# Allegro board OSCILLATOR.brd
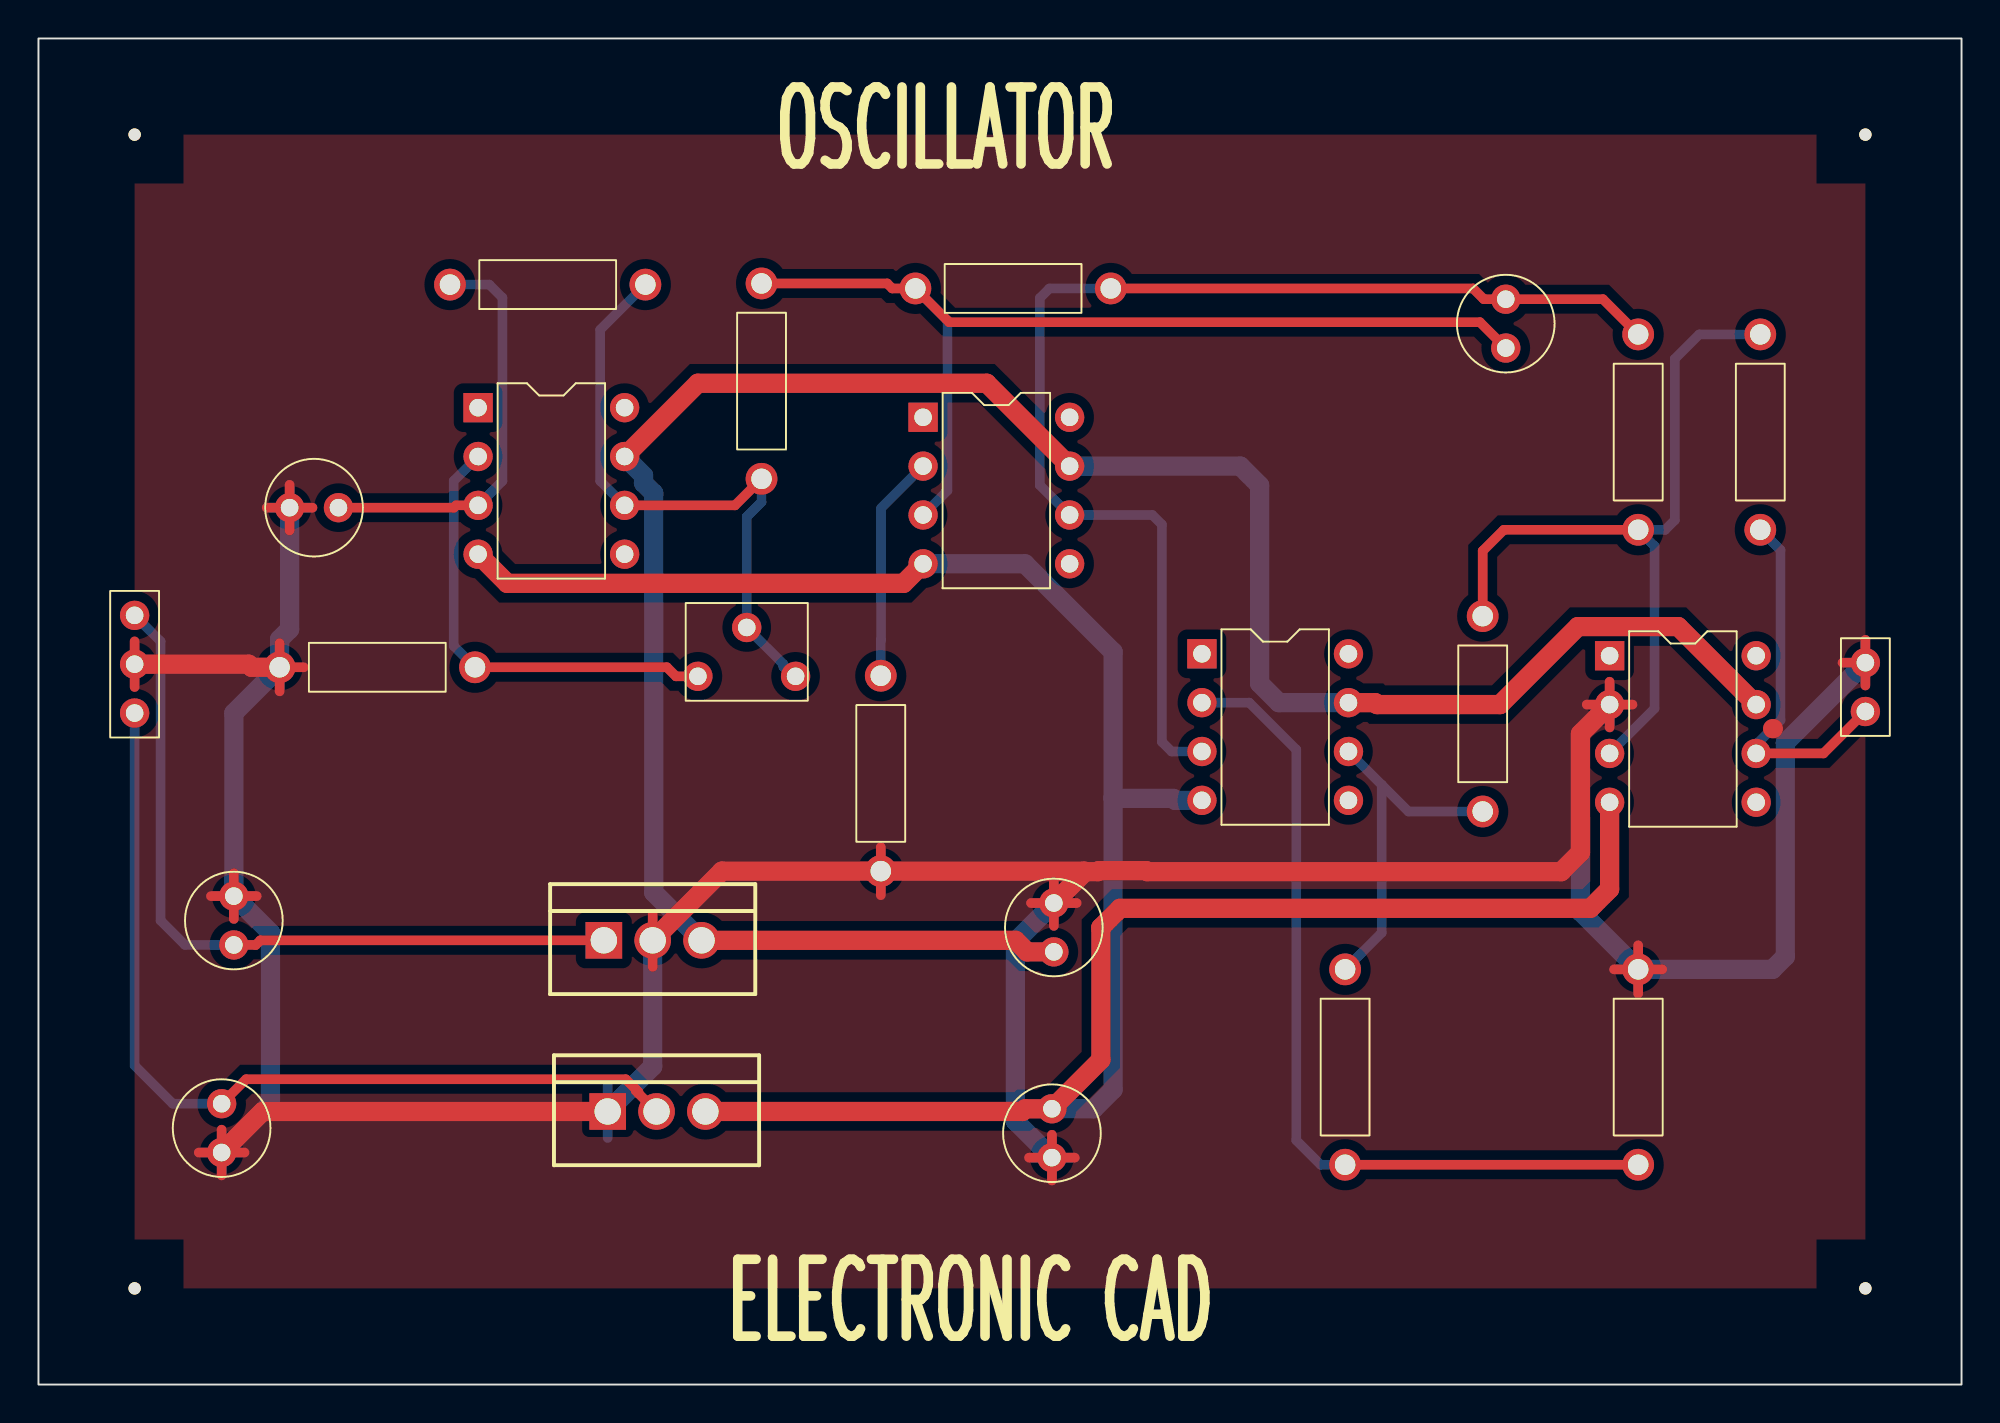
[diagram p0: board, top side]
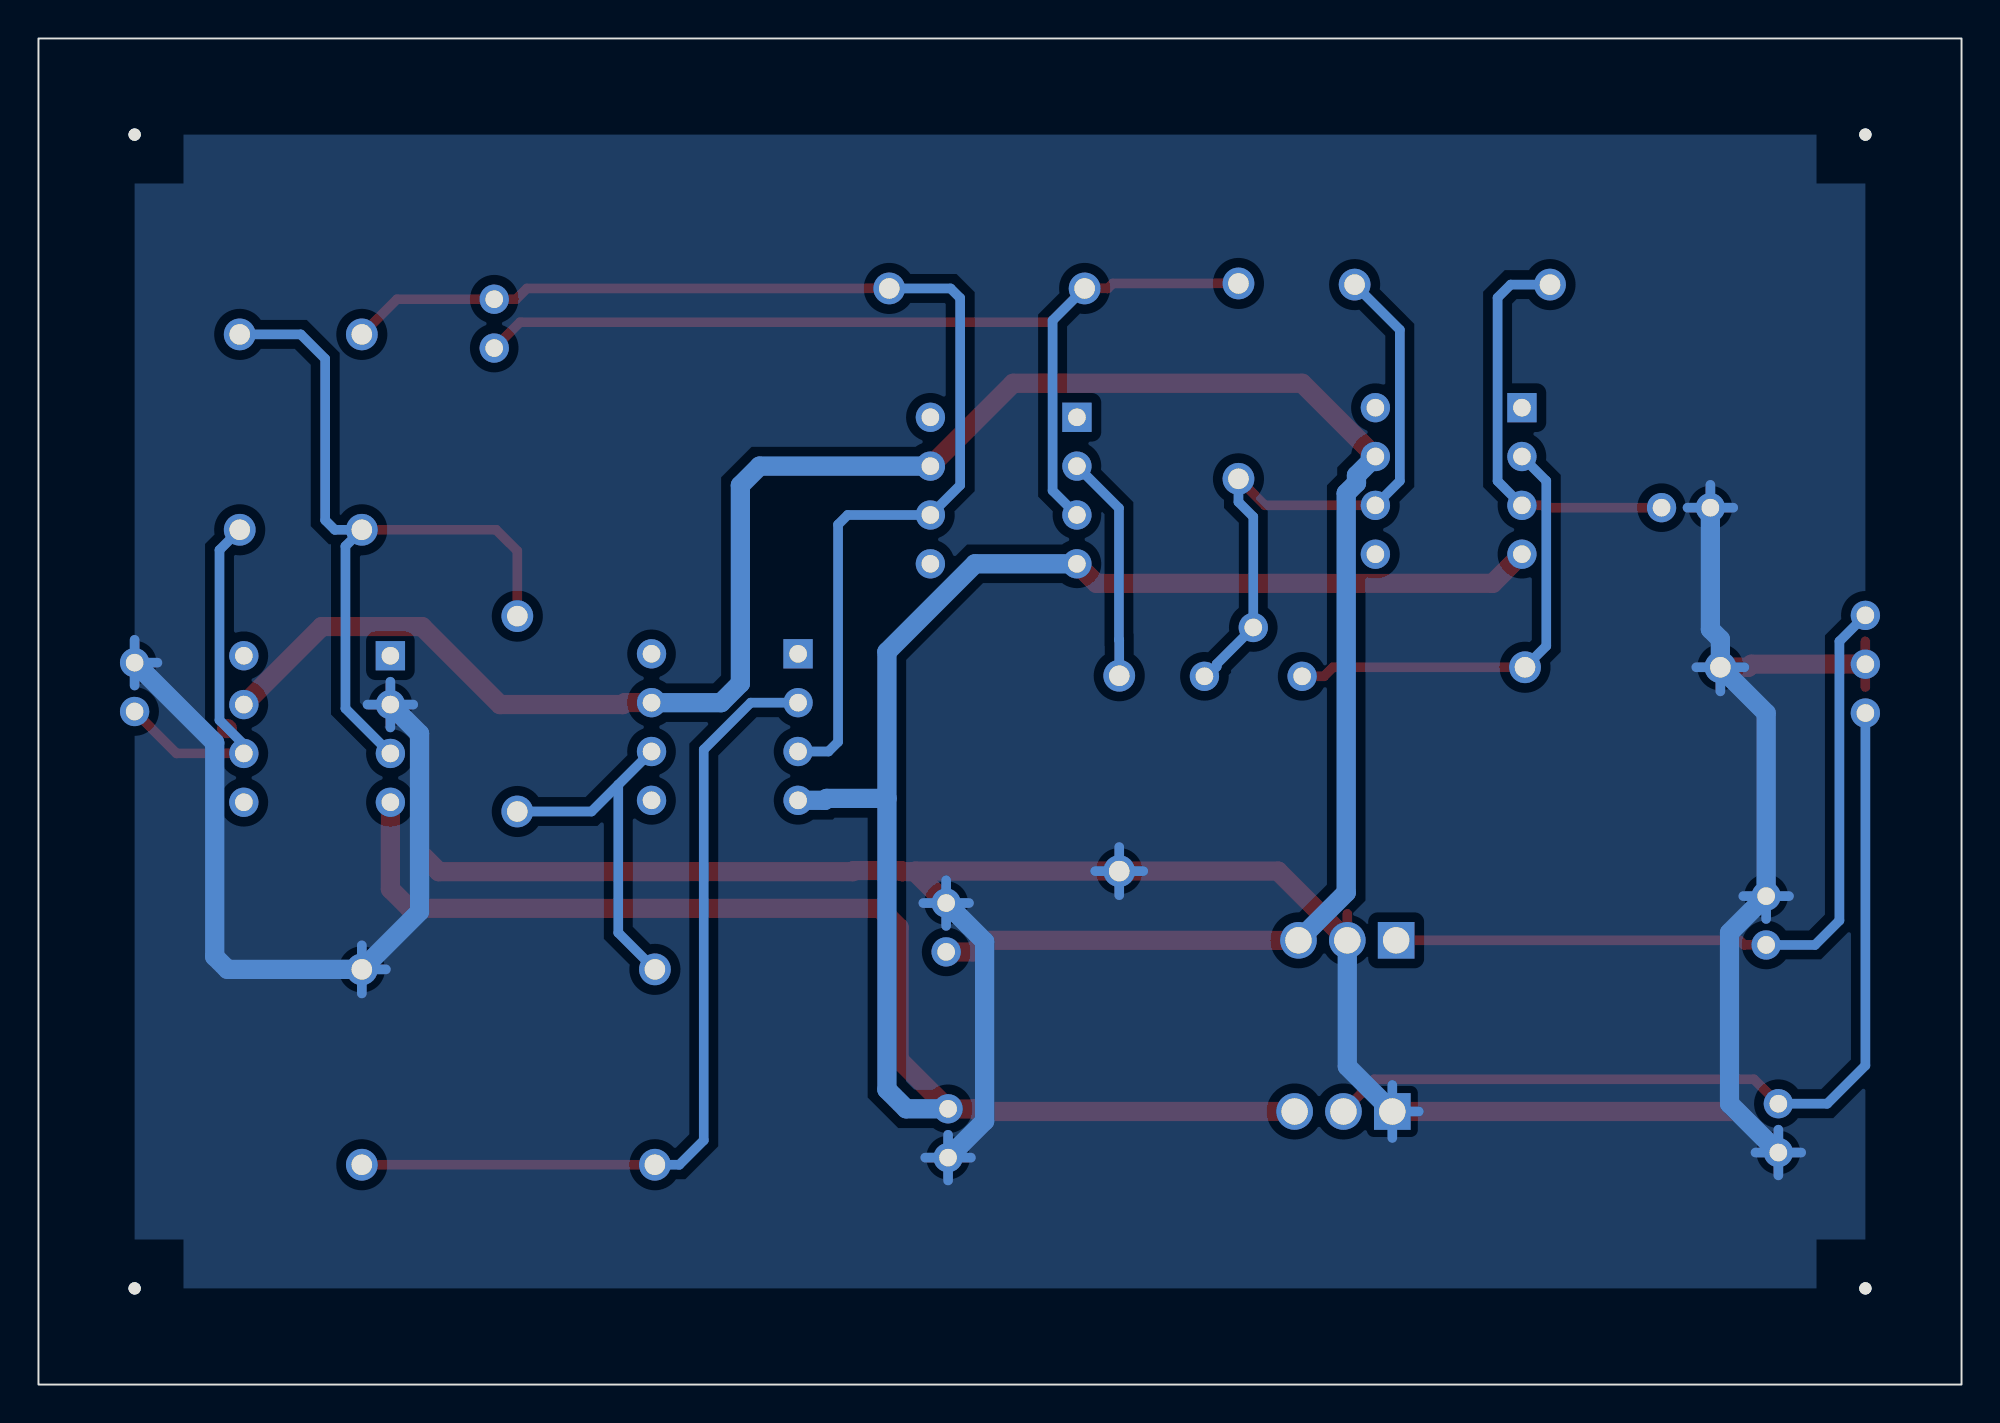
[diagram p1: board, bottom side, seen from below]

Outline 100 x 70 mm; copper layers: TOP, BOTTOM. Coordinates in mm from the lower left corner of the outline.
Outline path: rectangle 0,0 100,70

## Design rules (mm)
constraint set DEFAULT: min track width 0.5, pair gap 0.5
net group POWERWORKS: nets +VCC -VCC

## Placement (name value [footprint] x y rotation side)
C1  270pF  [CAP196]  15.6 45.6 90 top
C2  0.001uF  [CAP196]  76.3 53.9 0 top
C3  0.1uF  [CAP196]  10.16 22.86 0 top
C4  0.1uF  [CAP196]  9.53 12.06 0 top
C5  0.1uF  [CAP196]  52.8 22.5 0 top
C6  0.1uF  [CAP196]  52.7 11.8 0 top
J1  CON3  [JUMPER3]  5 40 270 top
J2  CON2  [JUMPER2]  95 35 90 top
NOREF  -  [unnamed]  95 65 0 top
NOREF#2  -  [#2]  100 0 90 top
NOREF#3  -  [unnamed]  95 5 0 top
NOREF#4  -  [unnamed]  5 65 0 top
NOREF#5  -  [unnamed]  5 5 0 top
NOREF#6  -  [#2]  0 70 0 top
R1  10k  [RES400]  22.7 37.3 90 top
R2  62k  [RES400]  37.6 47.1 0 top
R3  10k  [RES400]  21.4 57.2 270 top
R4  1M  [RESADJ]  39.37 36.83 270 top
R5  100k  [RES400]  45.6 57 270 top
R6  10k  [RES400]  43.8 26.7 0 top
R7  10k  [RES400]  75.1 29.8 0 top
R8  10k  [RES400]  83.19 54.61 180 top
R9  10k  [RES400]  89.53 54.61 180 top
R10  10k  [RES400]  67.94 11.43 0 top
R11  10k  [RES400]  83.19 21.59 180 top
U1  LF351  [DIP8_3]  22.86 50.8 0 top
U2  LF351  [DIP8_3]  46 50.3 0 top
U3  LM7812C  [TO220AB]  29.4 23.1 0 top
U4  LM7912C  [TO220AB]  29.6 14.2 0 top
U5  LF351  [DIP8_3]  60.5 38 0 top
U6  LF351  [DIP8_3]  81.7 37.9 0 top

## Library data of the parts
C1-C6 = CAP NP: Tolerance: ***; User Part Number: ***
J1 = CON3: User Part Number: ***
J2 = CON2: User Part Number: ***
R1-R3 R5-R11 = R: Tolerance: ***; User Part Number: ***
R4 = POT: Tolerance: ***; User Part Number: ***
U1 U2 U5 U6 = LF351: Tolerance: ***; User Part Number: ***
U3 = LM7812C_1
U4 = LM7912C_3

## Footprints (pads in the part's own frame, mm; a bottom-side part is the same pattern mirrored in y, then rotated)
CAP196
  round 1.524 hole 0.914: 1(0,0) 2(0,2.54)
DIP8_3
  rect 1.524x1.524 hole 0.914: 1(0,0)
  round 1.524 hole 0.914: 2(0,-2.54) 3(0,-5.08) 4(0,-7.62) 5(7.62,-7.62) 6(7.62,-5.08) 7(7.62,-2.54) 8(7.62,0)
JUMPER2
  round 1.524 hole 0.914: 1(0,0) 2(2.54,0)
JUMPER3
  round 1.524 hole 0.914: 1(0,0) 2(2.54,0) 3(5.08,0)
RES400
  round 1.651 hole 1.067: 1(0,0) 2(0,10.16)
RESADJ
  round 1.524 hole 0.914: 1(0,0) 2(-2.54,-2.54) 3(0,-5.08)
TO220AB
  rect 1.905x1.905 hole 1.372: 1(0,0)
  round 1.905 hole 1.372: 2(2.54,0) 3(5.08,0)
unnamed
  round 0.635 hole 3.175 unplated: (0,0)

## Nets
+VCC: C5.1 U1.7 U2.7 U3.3(OUT) U5.7 U6.7
-VCC: C6.2 U1.4(V-) U2.4(V-) U4.3(OUT) U5.4(V-) U6.4(V-)
GND: C1.2 C3.2 C4.1 C5.2 C6.1 J1.2 J2.2 R1.2 R6.1 R11.1 U3.2 U4.1 U6.2
OUT: C3.1 J1.1 U3.1
SIG: C2.2 R5.2 R8.1 U2.6 U5.3
N00233: C1.1 R3.1 U1.3
N00258: R1.1 R4.3 U1.2
N00276: R2.1 R3.2 R4.1 R4.2(WIPER) U1.6
N00401: C2.1 R2.2 R5.1 U2.3
N00560: R6.2 U2.2
N00834: C4.2 J1.3 U4.2
N02155: R7.2 R8.2 R9.1 U6.3
N02167: R7.1 R10.2 U5.6
N02180: R10.1 R11.2 U5.2
N02221: J2.1 R9.2 U6.6

Pads without a net: U1 1 5 8; U2 1 5 8; U5 1 5 8; U6 1 5 8

## Routing (per net, layer and track width the routed paths; a pad name or vN(x,y) marks a point on that pad's centre or on a via; arc(x,y) is an arc through that point)
+VCC: length 122.1
  TOP w1: U5.7 69.51,35.46 69.61,35.36 76,35.36 80.06,39.42 85.26,39.42 U6.7 ; U3.3 50.81,23.1 51.41,22.5 C5.1 ; U2.7 49.31,52.07 34.29,52.07 U1.7
  BOTTOM w1: U2.7 62.5,47.76 63.5,46.76 63.5,36.46 64.5,35.46 U5.7 ; U1.7 31.46,47.28 31.46,46.88 32,46.35 32,25.58 U3.3
-VCC: length 127.3
  TOP w1: U4.3 51.17,14.2 51.31,14.34 C6.2 55.24,16.89 55.24,23.77 56.24,24.77 80.7,24.77 81.7,25.77 U6.4 ; U2.4 44.98,41.66 24.38,41.66 U1.4
  BOTTOM w1: 55.88,30.48 55.88,15.34 54.88,14.34 C6.2 ; 55.88,30.48 55.88,38.1 51.3,42.68 U2.4 ; 55.88,30.48 59.01,30.48 59.11,30.38 U5.4
GND: length 286.1
  TOP w0.5: 12.54,36.05 R1.2 ; R1.2 12.54,38.55 ; R1.2 13.79,37.3 ; 10.16,24.21 C3.2 ; C3.2 8.97,25.4 ; C3.2 11.35,25.4 ; C3.2 10.16,26.59 ; 43.8,27.95 R6.1 43.8,25.45 ; 5,38.65 J1.2 5,36.27 ; U6.2 81.7,36.55 ; U6.2 80.51,35.36 ; U6.2 81.7,34.17 ; U6.2 82.89,35.36 ; C6.1 53.89,11.8 ; C6.1 52.7,12.99 ; C6.1 52.7,10.61 ; C6.1 51.51,11.8 ; 93.81,37.54 J2.2 ; J2.2 95,36.35 ; J2.2 95,38.73 ; 11.87,45.6 C1.2 ; C1.2 13.06,46.79 ; C1.2 13.06,44.41 ; C1.2 14.25,45.6 ; C4.1 9.53,13.25 ; C4.1 10.71,12.06 ; C4.1 9.53,10.88 ; C4.1 8.34,12.06 ; 31.94,24.48 U3.2 31.94,21.72 ; 83.19,20.34 R11.1 ; R11.1 84.44,21.59 ; R11.1 81.93,21.59 ; R11.1 83.19,22.84 ; 52.8,23.85 C5.2 ; C5.2 53.99,25.04 ; C5.2 51.61,25.04 ; C5.2 52.8,26.23
  TOP w1: R1.2 11.09,37.3 10.93,37.46 J1.2 ; U3.2 35.54,26.7 R6.1 54.4,26.7 54.43,26.67 ; 54.43,26.67 55.09,26.67 55.14,26.73 57.6,26.73 57.65,26.67 79.18,26.67 80.18,27.67 80.18,33.84 U6.2 ; 54.43,26.67 C5.2 ; 90.21,34.11 90.18,34.11 ; U4.1 11.66,14.2 C4.1
  BOTTOM w0.5: C4.1 9.53,13.25 ; C4.1 9.53,10.88 ; C4.1 8.34,12.06 ; C4.1 10.71,12.06 ; 42.55,26.7 R6.1 ; R6.1 43.8,25.45 ; R6.1 45.05,26.7 ; R6.1 43.8,27.95 ; 29.6,12.82 U4.1 ; U4.1 29.6,15.58 ; U4.1 28.22,14.2 ; C6.1 53.89,11.8 ; C6.1 52.7,10.61 ; C6.1 51.51,11.8 ; C6.1 52.7,12.99 ; 81.93,21.59 R11.1 ; R11.1 83.19,22.84 ; R11.1 83.19,20.34 ; C1.2 13.06,46.79 ; C1.2 14.25,45.6 ; C1.2 11.87,45.6 ; C5.2 53.99,25.04 ; C5.2 51.61,25.04 ; C5.2 52.8,23.85 ; C5.2 52.8,26.23 ; 10.16,24.21 C3.2 ; C3.2 8.97,25.4 ; C3.2 11.35,25.4 ; R1.2 13.79,37.3 ; R1.2 12.54,36.05 ; R1.2 11.29,37.3 ; 80.51,35.36 U6.2 ; U6.2 81.7,34.17 ; U6.2 81.7,36.55 ; U6.2 82.89,35.36 ; 93.81,37.54 J2.2 ; J2.2 95,38.73 ; J2.2 95,36.35
  BOTTOM w1: U4.1 31.94,16.54 U3.2 ; C6.1 50.8,13.7 50.8,23.04 C5.2 ; U6.2 80.18,33.84 80.18,24.59 R11.1 90.17,21.59 90.84,22.26 90.84,33.38 J2.2 ; C4.1 12.06,14.61 12.06,23.5 C3.2 10.16,34.92 R1.2 12.54,38.75 13.06,39.27 C1.2
OUT: length 40.1
  TOP w0.5: U3.1 11.54,23.1 11.3,22.86 C3.1
  BOTTOM w0.5: C3.1 7.62,22.86 6.35,24.13 6.35,38.65 J1.1
SIG: length 62.8
  TOP w0.5: R5.2 74.6,57 75.16,56.44 C2.2 81.36,56.44 R8.1
  BOTTOM w0.5: R5.2 52.57,57 52.07,56.5 52.07,46.77 U2.6 57.92,45.22 58.42,44.72 58.42,33.42 58.92,32.92 U5.3
N00233: length 21.6
  TOP w0.5: C1.1 21.6,45.6 21.72,45.72 U1.3
  BOTTOM w0.5: R3.1 23.44,57.2 24.13,56.52 24.13,46.99 U1.3
N00258: length 23.7
  TOP w0.5: R4.3 33.15,36.83 32.68,37.3 R1.1
  BOTTOM w0.5: U1.2 21.59,46.99 21.59,38.41 R1.1
N00276: length 32.4
  TOP w0.5: R2.1 36.22,45.72 U1.6
  BOTTOM w0.5: R4.1 39.23,36.83 38.73,37.33 38.73,37.47 R4.2 36.83,45.13 37.6,45.9 R2.1 ; U1.6 29.21,46.99 29.21,54.85 R3.2
N00401: length 53.1
  TOP w0.5: R2.2 44.14,57.26 44.4,57 R5.1 47.35,55.24 74.95,55.24 C2.1
  BOTTOM w0.5: R5.1 47.27,55.33 47.27,46.49 U2.3
N00560: length 11.8
  BOTTOM w0.5: U2.2 43.81,45.58 43.81,38.73 43.8,38.72 R6.2
N00834: length 47.8
  TOP w0.5: 31.2,15.14 31.2,15.22 31.06,15.36 ; 31.2,15.14 31.06,15.28 31.06,15.36 ; 31.2,15.14 U4.2 ; 31.06,15.36 30.54,15.88 10.79,15.88 C4.2
  BOTTOM w0.5: C4.2 6.99,14.61 5,16.59 J1.3
N02155: length 40.4
  TOP w0.5: R7.2 75.1,43.35 76.2,44.45 R8.2
  BOTTOM w0.5: R9.1 86.36,54.61 85.09,53.34 85.09,44.95 84.59,44.45 R8.2 84.04,43.6 84.04,35.16 U6.3
N02167: length 18.7
  BOTTOM w0.5: 69.85,31.19 71.24,29.8 R7.1 ; 69.85,31.19 U5.6 ; 69.85,31.19 69.85,23.5 R10.2
N02180: length 44.5
  TOP w0.5: R10.1 R11.2
  BOTTOM w0.5: R10.1 66.67,11.43 65.41,12.7 65.41,33.02 62.96,35.46 U5.2
N02221: length 19.2
  TOP w0.5: U6.6 92.82,32.82 J2.1
  BOTTOM w0.5: R9.2 90.59,43.4 90.59,34.55 89.32,33.28 U6.6

## Copper pours and planes (outline as drawn; the poured copper is in the pictures)
GND on TOP: 95,5 95,65 5,65 5,5 ; 2 cut-outs
GND on BOTTOM: 95,5 95,65 5,65 5,5 ; 4 cut-outs

## Text on the board
Ref Des/Silkscreen Top: ELECTRONIC CAD | OSCILLATOR
DIMENSION: FIGURE | FINISHED_SIZE | 0.914 | 1.067 | 1.372 | 3.175 | DRILL CHART: TOP to BOTTOM | ALL UNITS ARE IN MILLIMETERS | PLATED | NON-PLATED | QTY | 52 | 20 | 6 | 4
